# EAGLE board backfin_wifi (EAGLE 6.3)
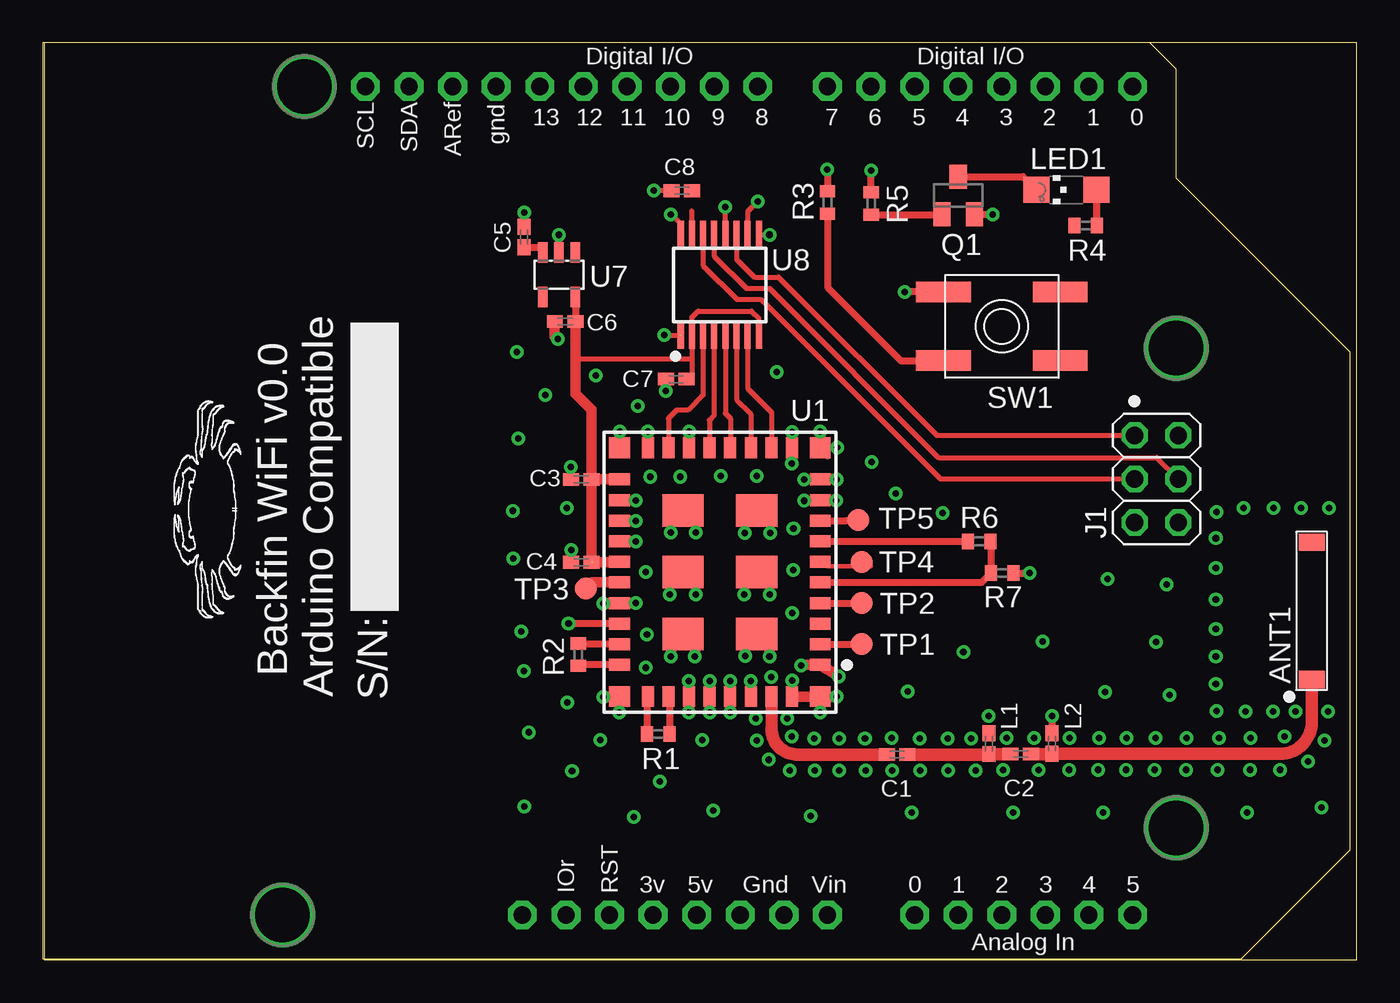
[diagram p0: board, top side]
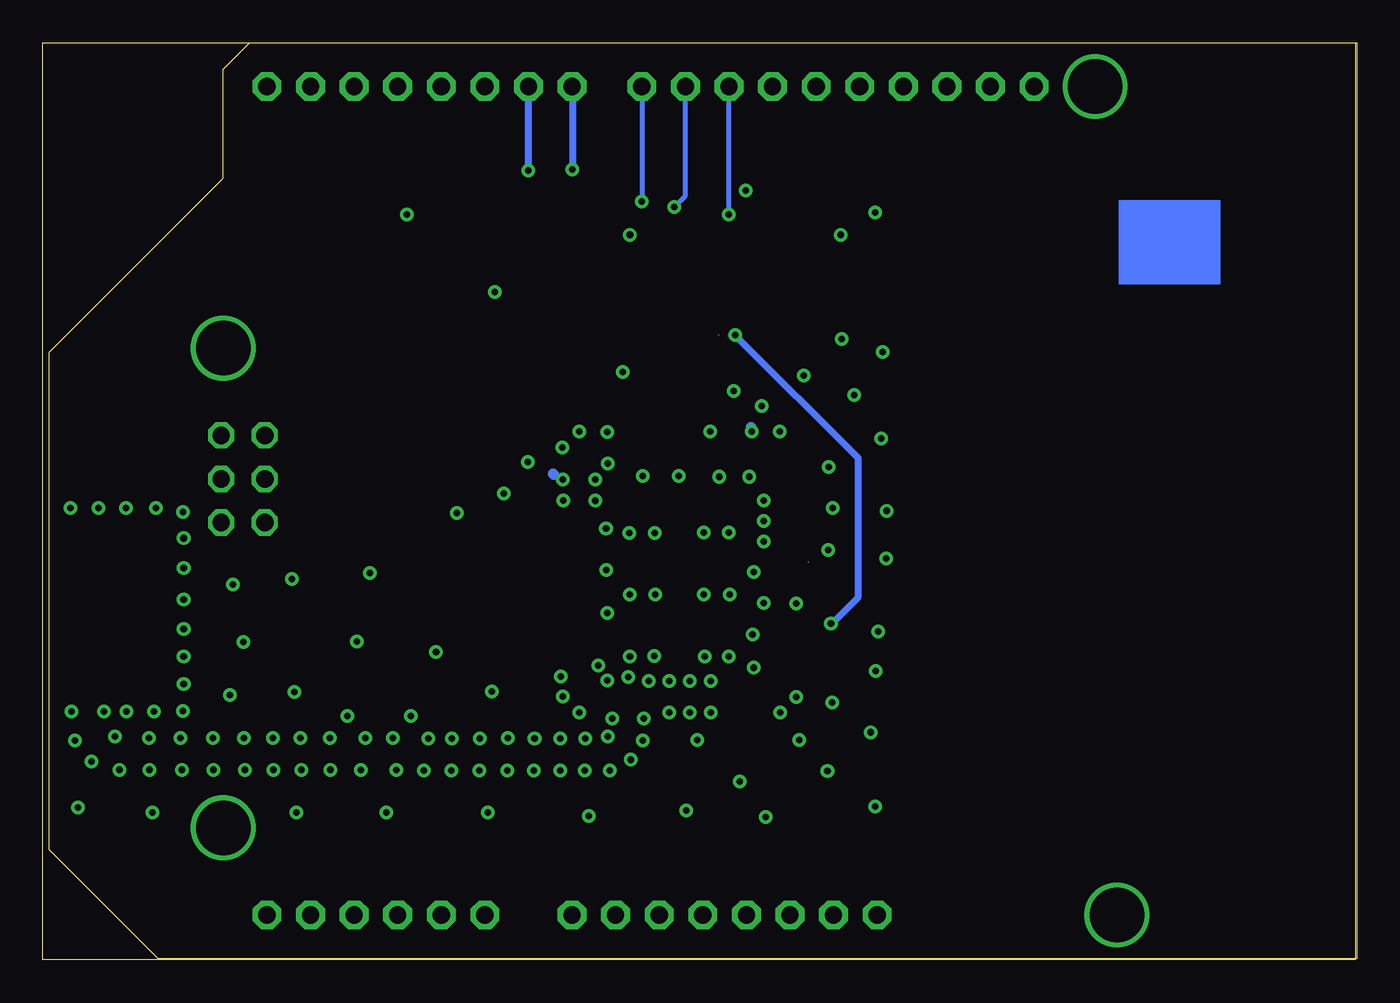
[diagram p1: board, bottom side, seen from below]

Size 76.48 x 53.42 mm. Coordinates in mm from the lower left corner, seen from the top.
Copper layers (1*16): Top 0.035mm / dielectric 59mil / Bottom 0.035mm
Design rules "default *": minimum track width 6mil, minimum drill 14mil, track to track 6mil, track to pad 6mil, pad to pad 6mil, via to via 6mil, smd to smd 6mil, copper to edge 6mil, drill to drill 0.000534375mm, minimum pad ring 10mil, minimum via ring 8mil, stop-mask expansion 4mil, vias tented up to drill 15mil, thermal gap 10mil

## Footprints (pad centres in the part's own frame; a part is rotated, then mirrored left to right if it is on the bottom)
AT8010-E2R9HAA = smd 1 x 1.5: 1 0,0; 2 8,0
C0402K = smd 0.925 x 0.74: 1 -0.6,0; 2 0.6,0
2X03 = drill 1.016 octagon: 1 -2.54,-1.27; 2 -2.54,1.27; 3 0,-1.27; 4 0,1.27; 5 2.54,-1.27; 6 2.54,1.27
0402 = smd 0.925 x 0.74: 1 -0.6,0; 2 0.6,0
CHIPLED_1206 = smd 1.5 x 1.5: A 0,-1.75; C 0,1.75
SOT23 = smd 1 x 1.4: 1 -0.95,-1.1; 2 0.95,-1.1; 3 0,1.1
R1005 = smd 0.7 x 0.9: 1 -0.65,0; 2 0.65,0
EVQ-Q2 = smd 3.2 x 1.2: A -3.4,-2; A' 3.4,-2; B -3.4,2; B' 3.4,2
B1,27 = smd 1.27 x 1.27: TP 0,0
CC3000MOD = smd 1.2 x 0.7: P$1 0.9,13.55; P$2 0.9,12.35; P$3 0.9,11.15; P$4 0.9,9.95; P$5 0.9,8.75; P$6 0.9,7.55; P$7 0.9,6.35; P$8 0.9,5.15; P$9 0.9,3.95; P$10 0.9,2.75; P$19 12.6,2.75; P$20 12.6,3.95; P$21 12.6,5.15; P$22 12.6,6.35; P$23 12.6,7.55; P$24 12.6,8.75; P$25 12.6,9.95; P$26 12.6,11.15; P$27 12.6,12.35; P$28 12.6,13.55 | smd 0.7 x 1.2: P$11 2.55,0.9; P$12 3.75,0.9; P$13 4.95,0.9; P$14 6.15,0.9; P$15 7.35,0.9; P$16 8.55,0.9; P$17 9.75,0.9; P$18 10.95,0.9; P$29 10.95,15.4; P$30 9.75,15.4; P$31 8.55,15.4; P$32 7.35,15.4; P$33 6.15,15.4; P$34 4.95,15.4; P$35 3.75,15.4; P$36 2.55,15.4 | smd 2.4 x 1.9: P$37 4.6,11.75; P$38 4.6,8.15; P$39 4.6,4.55; P$40 8.9,11.75; P$41 8.9,8.15; P$42 8.9,4.55 | smd 1.2 x 1.2: P$43 0.9,15.4; P$44 0.9,0.9; P$45 12.6,0.9; P$46 12.6,15.4
ARDUINOR3 = drill 1 pad 1.676 octagon: 3V 35.56,2.54; 5V 38.1,2.54; A0 50.8,2.54; A1 53.34,2.54; A2 55.88,2.54; A3 58.42,2.54; A4 60.96,2.54; A5 63.5,2.54; AREF 23.876,50.8; D0 63.5,50.8; D1 60.96,50.8; D2 58.42,50.8; D3 55.88,50.8; D4 53.34,50.8; D5 50.8,50.8; D6 48.26,50.8; D7 45.72,50.8; D8 41.656,50.8; D9 39.116,50.8; D10 36.576,50.8; D11 34.036,50.8; D12 31.496,50.8; D13 28.956,50.8; GND 26.416,50.8; GND1 43.18,2.54; GND2 40.64,2.54; IOREF 30.48,2.54; RESERVED 27.94,2.54; RESET 33.02,2.54; SCL 18.796,50.8; SDA 21.336,50.8; VIN 45.72,2.54
SOT23-DBV = smd 0.55 x 1.2: 1 -0.95,-1.3; 2 0,-1.3; 3 0.95,-1.3; 4 0.95,1.3; 5 -0.95,1.3
TSSOP16 = smd 0.35 x 1.6: 1 -2.275,-2.925; 2 -1.625,-2.925; 3 -0.975,-2.925; 4 -0.325,-2.925; 5 0.325,-2.925; 6 0.975,-2.925; 7 1.625,-2.925; 8 2.275,-2.925; 9 2.275,2.925; 10 1.625,2.925; 11 0.975,2.925; 12 0.325,2.925; 13 -0.325,2.925; 14 -0.975,2.925; 15 -1.625,2.925; 16 -2.275,2.925

## Placement (x,y rotation side)
ANT1  AT8010-E2R9HAA  [AT8010-E2R9HAA]  73.86,16.33 90 top
C1  10pF  [C0402K]  49.71,11.96 180 top
C2  2.2pF  [C0402K]  56.9,11.99 180 top
C3  1uF  [C0402K]  31.29,27.99 0 top
C4  1uF  [C0402K]  31.29,23.16 0 top
C5  1uF  [C0402K]  27.97,42.11 90 top
C6  1uF  [C0402K]  30.35,37.19 180 top
C7  1uF  [C0402K]  36.83,33.83 0 top
C8  1uF  [C0402K]  37.16,44.81 0 top
J1  [2X03]  64.82,28.02 270 top
L1  2.2nH  [0402]  55.05,12.59 90 top
L2  NL  [0402]  58.72,12.6 90 top
LED1  [CHIPLED_1206]  59.56,44.86 90 top
Q1  [SOT23]  53.26,44.53 0 top
R1  0  [R1005]  35.79,13.16 0 top
R2  0  [R1005]  31.11,17.78 270 top
R3  330  [R1005]  45.64,44.12 270 top
R4  330  [R1005]  60.68,42.77 0 top
R5  0  [R1005]  48.18,44.07 270 top
R6  0  [R1005]  54.48,24.38 0 top
R7  NL  [R1005]  55.83,22.53 0 top
SW1  SPST_TACT-EVQQ2  [EVQ-Q2]  55.8,36.91 180 top
TP1  TPB1,27  [B1,27]  47.65,18.39 0 top
TP2  TPB1,27  [B1,27]  47.65,20.78 0 top
TP3  TPB1,27  [B1,27]  31.57,21.64 0 top
TP4  TPB1,27  [B1,27]  47.62,23.16 0 top
TP5  TPB1,27  [B1,27]  47.45,25.63 0 top
U1  CC3000MOD  [CC3000MOD]  46.13,30.73 180 top
U2  ARDUINOR3-DIMENSION  [ARDUINOR3]  -0.08,0.08 0 top
U7  TLV70236SOT23-5  [SOT23-DBV]  30,39.9 180 top
U8  TXB0106TSSOP16  [TSSOP16]  39.37,39.32 0 top

## Library data of the parts
ANT1 L1 L2 U1 U2 U7 U8 = custom
C1-C4 C7 C8 = rcl
C5 C6 R1-R7 = resistor
J1 = pinhead
LED1 Q1 SW1 = adafruit
TP1-TP5 = testpad

## Nets
+3V3: U2.3V
+5V: C5.1 C8.2 J1.2 R4.1 U2.5V U7.1 U7.3 U8.15
GND: C3.1 C4.1 C5.2 C6.2 C7.1 C8.1 J1.6 L1.2 L2.2 Q1.2 R7.2 SW1.A' U1.P$1 U1.P$9 U1.P$10 U1.P$11 U1.P$16 U1.P$18 U1.P$20 U1.P$21 U1.P$22 U1.P$25 U1.P$31 U1.P$32 U1.P$33 U1.P$34 U1.P$36 U1.P$37 U1.P$38 U1.P$39 U1.P$40 U1.P$41 U1.P$42 U1.P$43 U1.P$44 U1.P$45 U1.P$46 U2.GND U2.GND1 U2.GND2 U7.2 U8.9
N$1: R6.1 U1.P$7
N$2: R6.2 R7.1 U1.P$5
N$3: TP1.TP U1.P$2
N$4: TP2.TP U1.P$4
N$5: TP4.TP U1.P$6
N$6: TP5.TP U1.P$8
N$7: TP3.TP U1.P$24
N$8: R2.2 U1.P$28
N$9: R2.1 U1.P$27
N$10: R1.1 U1.P$29
N$11: R1.2 U1.P$30
N$12: C1.2 U1.P$35
N$13: C1.1 C2.2 L1.1
N$14: Q1.1 R5.2
N$15: ANT1.1 C2.1 L2.1
N$16: U1.P$26 U8.1
N$17: R3.1 U2.D7
N$18: R3.2 SW1.B'
N$19: R5.1 U2.D6
N$20: LED1.C Q1.3
N$21: LED1.A R4.2
SPI_CLK_HOST: J1.3 U8.14
SPI_CS_HOST: U2.D10 U8.16
SPI_DIN_HOST: J1.4 U8.13
SPI_DOUT_HOST: J1.1 U8.11
SPI_IRQ_HOST: U2.D9 U8.12
VBAT_SW_EN: U2.D8 U8.10
VCC: C3.2 C4.2 C6.1 C7.2 U1.P$19 U1.P$23 U7.5 U8.2 U8.8
VIN: U2.VIN
WL_SPI_CLK_HOST: U1.P$17 U8.3
WL_SPI_CS_HOST: U1.P$12 U8.7
WL_SPI_DIN_HOST: U1.P$15 U8.4
WL_SPI_DOUT_HOST: U1.P$13 U8.6
WL_SPI_IRQ_HOST: U1.P$14 U8.5

## Tracks (layer width: path | path; a pad name or v marks a point on that pad's centre or on a via)
+5V
  Top 0.305: U8.15 | U8.15 37.74,43.64
  Top 0.406: 27.98,41.51 C5.1 29.05,41.51 U7.3
  pour Top (isolate 0.305, rank 2): 0.76,52.58 64.06,52.58 65.13,51.51 65.13,44.53 75.29,34.37 75.29,26.11 68.5,26.11 68.5,14.68 75.29,14.68 75.29,7.06 69.14,0.91 0.76,0.91
GND  (via drill 0.38, 3.17)
  Top 0.254: 45.64,29.29 U1.P$44 | 45.64,28.02 U1.P$10 | 45.64,26.75 U1.P$9 | 45.64,15.32 U1.P$43
  Top 0.305: U8.9 v42.27,42.24 | C8.1 v35.51,44.81
  Top 0.406: v58.72,14.2 L2.2 | 45.24,15.34 U1.P$43 | R7.2 v57.43,22.53 | C3.1 30.69,28.69 v30.68,28.7 | C4.1 30.71,23.17 v30.71,23.88 | U1.P$16 37.59,29.83 | C6.2 29.77,37.19 | C5.2 v27.97,43.54 | U7.2 v30,42.24 | SW1.A' v50.15,38.91 v50.14,38.91 | Q1.2 55.26,43.43 v55.27,43.43
  Top 0.61: v46.18,15.34 45.24,15.34 43.61,15.34 | U1.P$9 46.14,26.78 v46.15,26.77 | 45.64,28.02 46.15,28.02 v46.18,27.99 | U1.P$11 v43.58,30.75 v43.59,30.76 | U1.P$44 45.23,30.77 v45.21,30.79 | U1.P$16 37.58,30.77 v37.59,30.79 | U1.P$18 v35.18,30.78 v35.18,30.79 | U1.P$45 v33.53,30.78 v33.53,30.79 | U1.P$25 32.62,20.78 v32.59,20.75 | U1.P$31 37.58,14.41 v37.57,14.4 | U1.P$32 v38.78,14.41 v38.79,14.4 | U1.P$33 v39.98,14.41 v39.98,14.4 | v40.84,17.7 40.84,18.3 U1.P$37 42.27,18.98 v42.27,17.68 | v37.92,17.68 37.92,18.98 U1.P$40 36.52,18.98 36.52,17.68 | U1.P$1 44.27,17.18 v44.12,17.15 | v34.47,25.58 33.48,25.58 | v34.47,24.38 U1.P$22 | v34.47,20.78 33.78,20.78 | v32.59,15.32 33.53,15.32 U1.P$46 | v45.21,14.4 45.24,14.4 45.24,15.21 | v46.3,16.51 45.24,17.17 | v41.17,16.26 41.17,15.39 | C6.2 29.75,36.34 v29.92,36.17
  Bottom 0.305: v42.27,42.24 42.34,42.24
  Bottom 0.406: v30.68,28.7 30.71,28.88 | v30,42.24 30,42.27 | v50.14,38.91 50.01,38.91 49.99,38.94 | v55.27,43.43 55.3,43.41
  Bottom 0.61: v35.18,30.79 35.2,31.04 | 46.68,28.27 46.74,28.32
  other vias: 55.04,14.2 36.5,17.68 34.47,26.77 36.22,33.15 34.59,32.26 32.13,34.04 29.21,32.89 27.53,35.41 27.64,30.38 30.45,26.31 27.3,26.16 27.33,23.37 27.81,19.13 27.99,8.94 27.94,16.84 33.5,14.4 36.45,21.29 37.97,21.29 40.79,21.29 42.29,21.29 42.32,24.87 40.82,24.87 37.97,24.89 36.53,24.89 43.56,28.91 44.3,27.99 44.3,26.75 43.66,25.12 43.64,22.71 43.59,20.22 41.53,28.19 39.42,28.19 37.06,28.14 35.13,18.95 46.2,29.84 35.31,28.14 35.05,22.61 35.05,17.02 37.57,16.26 38.79,16.26 39.98,16.26 28.24,13.26 30.48,14.99 30.76,11 32.41,12.8 34.37,8.33 35.86,10.39 38.35,12.8 42.37,16.48 41.45,14.07 43.59,16.28 43.31,14.07 41.53,12.78 42.21,11.66 43.56,13 43.43,11.02 46.33,11.02 44.88,12.9 44.91,11.02 46.33,12.9 42.68,34.23 39,8.71 44.68,8.38 50.55,8.58 56.47,8.58 61.7,8.58 70.09,8.58 74.43,8.87 47.88,11.02 47.83,12.9 49.4,11.02 49.38,12.93 51.05,11.02 51.03,12.9 52.68,11.02 52.65,12.9 57.96,11.05 57.68,12.93 59.77,12.93 59.72,11.07 55.88,11.05 56.08,12.93 54.28,11.02 54.03,12.9 61.47,12.93 61.42,11.07 63.07,12.93 63.04,11.07 64.77,12.93 64.72,11.07 66.57,12.93 66.55,11.07 68.45,12.93 68.38,11.07 70.31,12.93 70.28,11.07 72.29,13 72.01,11.07 72.92,14.48 73.64,11.57 74.6,12.78 74.8,14.48 71.6,14.48 70,14.48 68.33,14.5 68.28,16.08 68.28,17.68 68.28,19.28 68.28,21 65.4,21.87 68.28,22.83 64.81,18.53 61.82,15.6 65.59,15.44 61.96,22.19 58.17,18.55 53.57,17.94 50.31,15.64 48.22,29.01 49.63,27.16 52.37,26.03 68.28,24.56 68.33,26.09 69.9,26.32 71.63,26.32 73.25,26.32 74.88,26.32 65.96,7.7 65.96,35.64 15.16,50.88 13.89,2.62
  pour Top (no thermals): 31.95,31.65 47.17,31.65 47.17,13.84 31.95,13.84
  pour Top (isolate 0.152): 26.59,39.45 39.93,39.45 51.99,26.75 75.29,26.75 75.29,26.11 68.5,26.11 68.5,14.68 75.29,14.68 75.29,7.06 26.59,7.06
  pour Bottom (isolate 0.305, rank 2): 0.76,52.58 64.06,52.58 65.13,51.51 65.13,44.53 75.29,34.37 75.29,26.11 68.5,26.11 68.5,14.68 75.29,14.68 75.29,7.06 69.14,0.91 0.76,0.91
N$1
  Top 0.406: U1.P$7 R6.1
N$2
  Top 0.406: R6.2 55.17,24.33 55.17,22.53 R7.1 54.63,21.98 U1.P$5
N$3
  Top 0.406: U1.P$2 TP1.TP
N$4
  Top 0.406: U1.P$4 TP2.TP
N$5
  Top 0.254: U1.P$6 45.64,22.94 48.18,22.94 TP4.TP
N$6
  Top 0.406: U1.P$8 46.74,25.58 TP5.TP
N$7
  Top 0.61: U1.P$24 31.92,21.98 TP3.TP
N$8
  Top 0.406: U1.P$28 31.11,17.18 R2.2
N$9
  Top 0.406: U1.P$27 31.11,18.38 R2.1
N$10
  Top 0.406: U1.P$29 35.14,15.33 R1.1
N$11
  Top 0.406: U1.P$30 36.44,15.33 R1.2
N$12
  Top 0.406: U1.P$35 42.38,15.39
  Top 0.699: 42.38,15.39 42.38,13.48
  Top 0.737: 42.38,13.48 arc90 43.85,11.96 C1.2
N$13
  Top 0.406: 55.04,11.96 L1.1 | 56.15,11.99 C2.2
  Top 0.737: C1.1 55.04,11.96 | L1.1 56.15,11.99
N$14
  Top 0.406: R5.2 Q1.1
N$15
  Top 0.406: 58.75,11.99 L2.1
  Top 0.737: C2.1 58.75,11.99 | L2.1 72.02,12 arc90 73.86,13.85 ANT1.1
N$16  (via drill 0.38)  (1 unrouted)
  Top 0.305: v36.14,36.4 U8.1
  Top 0.406: U1.P$26 v30.56,19.58
  Bottom 0.406: v36.14,36.4 28.96,29.21 28.96,21.13 30.5,19.58 v30.56,19.58
N$17  (via drill 0.38)
  Top 0.406: v45.62,46.05 45.64,46.05 R3.1
  Bottom 0.406: U2.D7 45.62,50.88 v45.62,46.05
N$18
  Top 0.406: R3.2 45.64,39.19 49.94,34.9 SW1.B'
N$19  (via drill 0.38)
  Top 0.406: R5.1 v48.18,45.97
  Bottom 0.406: v48.18,45.97 U2.D6
N$20
  Top 0.406: Q1.3 57.04,45.63 LED1.C
N$21
  Top 0.305: 61.33,44.84 LED1.A
  Top 0.406: R4.2 61.33,44.84
SPI_CLK_HOST
  Top 0.305: U8.14 38.39,40.45 40.36,38.48 41.76,38.48 52.22,28.02 J1.3
SPI_CS_HOST  (via drill 0.38)
  Top 0.305: U8.16 37.09,42.84 v36.5,43.43
  Bottom 0.305: v36.5,43.43 U2.D10
SPI_DIN_HOST
  Top 0.305: U8.13 39.04,40.99 40.92,39.12 42.27,39.12 52.12,29.26 64.85,29.26 J1.4
SPI_DOUT_HOST
  Top 0.305: U8.11 40.34,40.81 41.38,39.78 42.8,39.78 52.02,30.56 J1.1
SPI_IRQ_HOST  (via drill 0.38)
  Top 0.305: U8.12 v39.69,43.87
  Bottom 0.305: v39.69,43.87 39.04,44.53 U2.D9
VBAT_SW_EN  (via drill 0.38)
  Top 0.305: v41.58,44.17 41,43.59 U8.10
  Bottom 0.305: U2.D8 v41.58,44.17
VCC  (1 unrouted)
  Top 0.305: U8.2 37.74,34.15 C7.2 37.41,33.82 | U8.2 37.74,34.98 30.97,34.98 | U8.2 37.74,37.44 38.1,37.8 41.23,37.8 41.63,37.39 41.63,36.41 U8.8
  Top 0.406: U1.P$19 | 33.53,23.17 U1.P$23 | U7.5 C6.1
  Top 0.61: C3.2 U1.P$19 | C4.2 33.53,23.17 | C3.2 31.89,32.06 30.97,32.98 30.97,34.98 30.97,37.17 C6.1 | 31.89,23.18 C3.2
WL_SPI_CLK_HOST
  Top 0.305: U8.3 38.39,32.91 37.52,32.03 36.86,32.03 36.37,31.55 U1.P$17
WL_SPI_CS_HOST
  Top 0.305: U8.7 40.99,33.3 42.39,31.9 42.39,29.85 U1.P$12
WL_SPI_DIN_HOST
  Top 0.305: U8.4 39.04,31.73 38.76,31.45 38.76,29.85 U1.P$15
WL_SPI_DOUT_HOST
  Top 0.305: U8.6 40.34,32.63 41.17,31.8 U1.P$13
WL_SPI_IRQ_HOST
  Top 0.305: U8.5 39.69,31.83 39.98,31.55 U1.P$14
(copper drawn outside any net)
  shapes: Bottom area x1

## Text on the board
tNames: Backfin WiFi v0.0 | Arduino Compatible | S/N: